# Altium PCB PCB引脚图.PcbDoc
Units mil, origin at the board's own origin, x right, y up, seen from the top; angles counter-clockwise.
Board outline 6000 x 4000 mil, 2 copper layers (Top Layer, Bottom Layer); 2 components, 34 nets, 14 pads, 0 vias.
Unrouted connection lines stored in the file: 1.
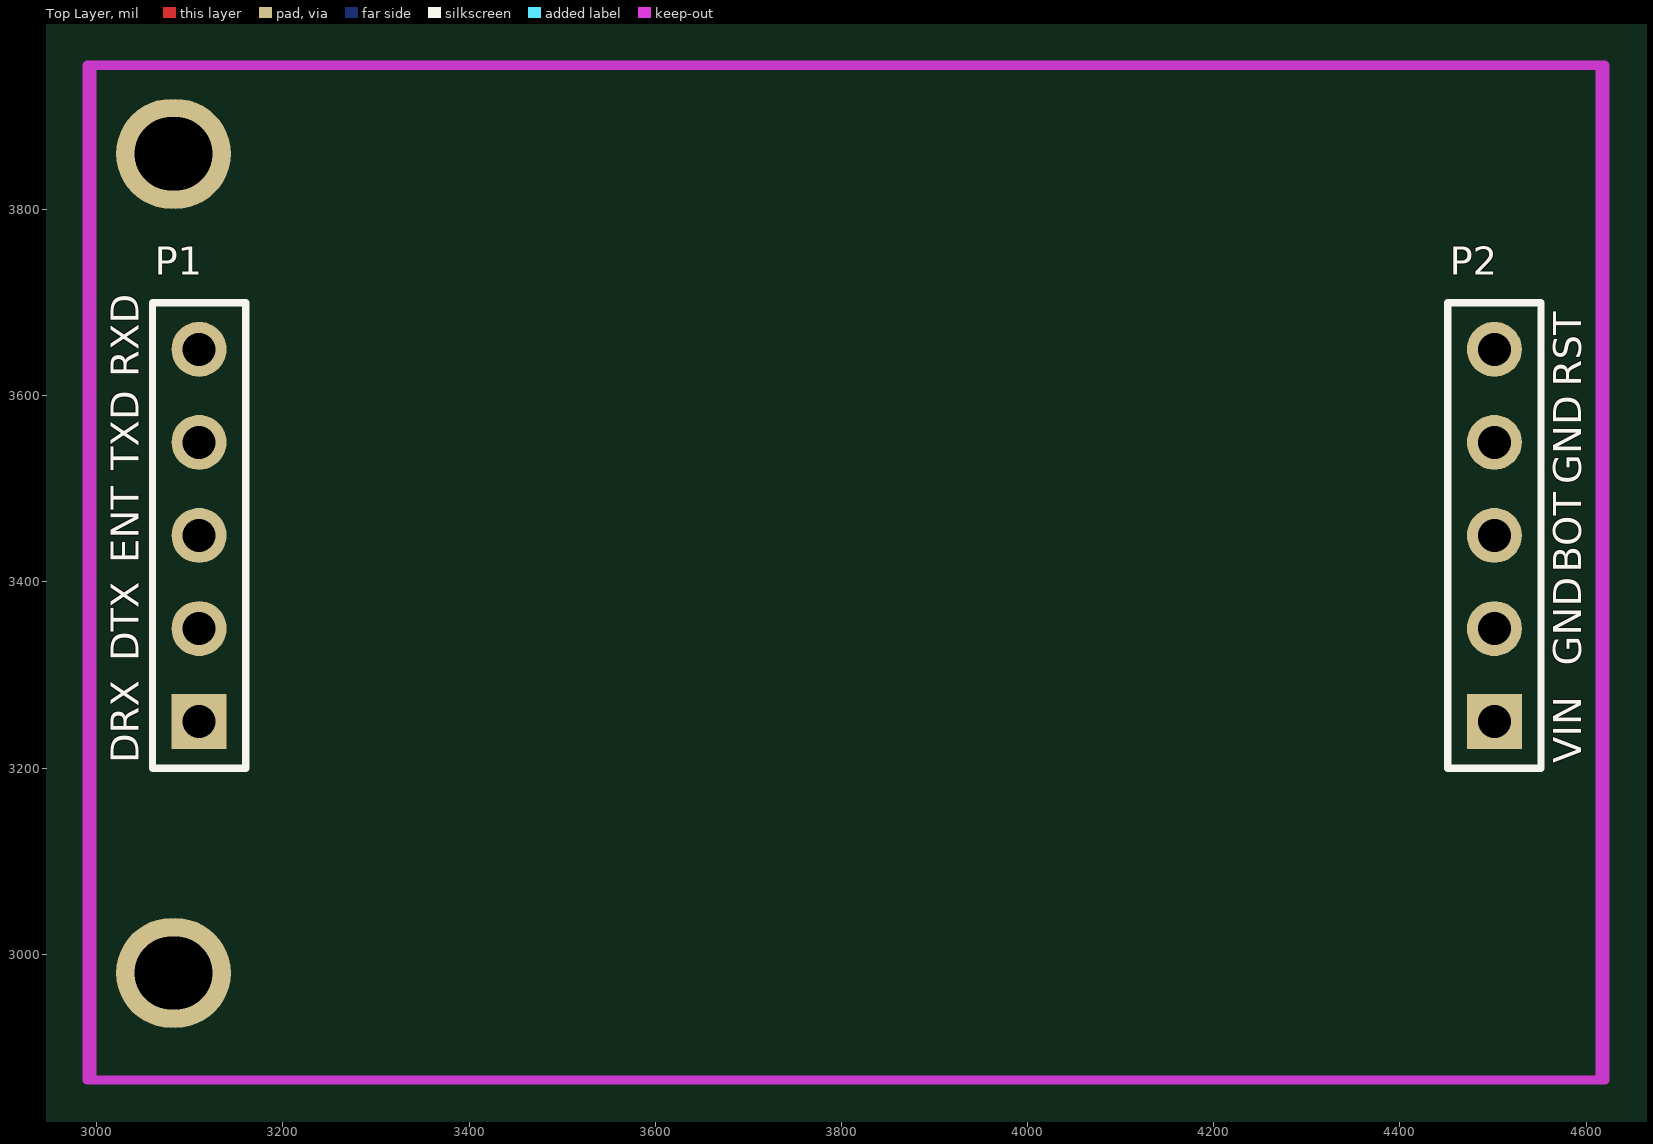
[diagram p0: Top Layer view]
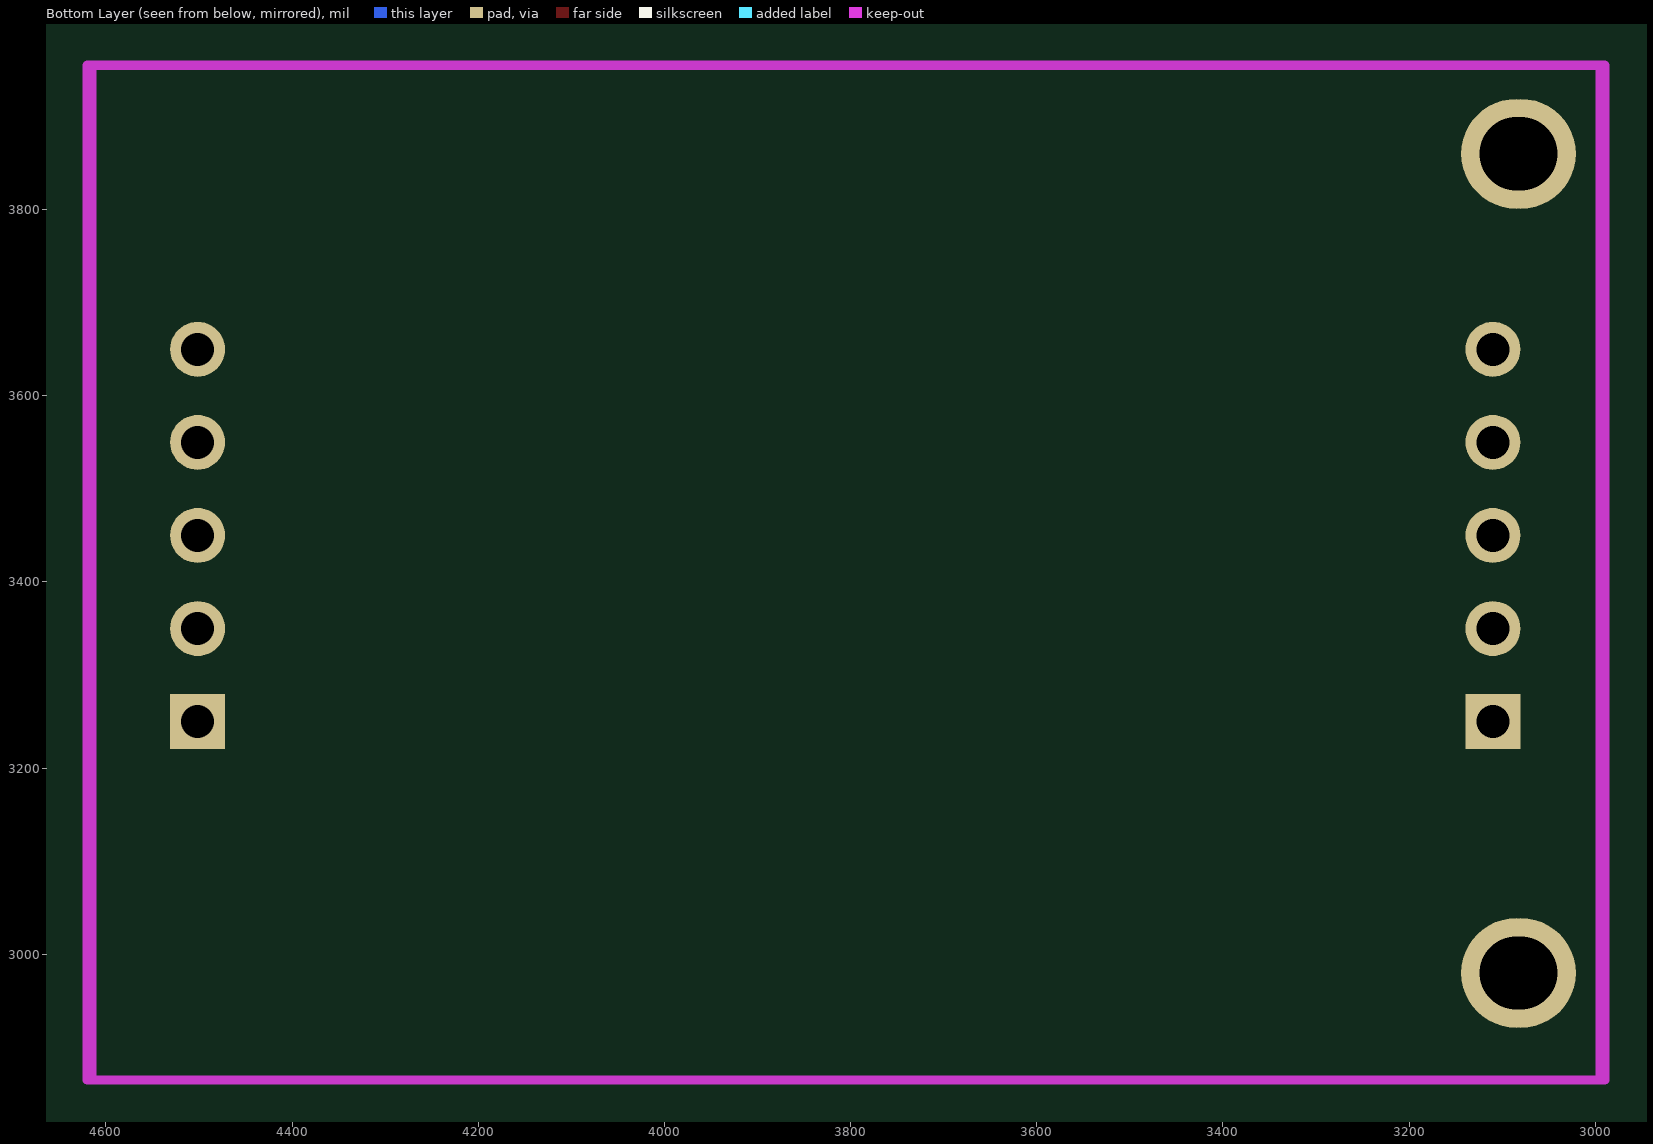
[diagram p1: Bottom Layer view, seen from below]

## Layer stack, top to bottom
Top Layer: signal copper 1.4
Dielectric: dielectric 12.6, FR-4, Dk 4.8
Bottom Layer: signal copper 1.4

## Board outline
1000,1000 7000,1000 7000,5000 1000,5000

## Design rules (kind name [scope] priority, off if disabled: settings)
Clearance [All] p1: gap=5.91
PlaneConnect [All] p1: planeconnectstyle=Direct reliefexpansion=20 reliefentries=4 reliefconductorwidth=10 reliefairgap=10
PolygonConnect [All] p1: connectstyle=Direct reliefconductorwidth=10 reliefentries=4 polygonreliefangle="90 Angle"
RoutingVias [All] p1: holewidth=28 width=50 viastyle="Through Hole" minholewidth=28 minwidth=50 maxholewidth=28 maxwidth=50
SilkToSilkClearance [InNet('No Net') vs InNet('No Net')] p1: silktosilkclearance=10
SilkscreenOverComponentPads [All] p1: minsilkscreentomaskgap=10
SolderMaskExpansion [All] p1: expansion=4
Width [All] p1: maxlimit=100 minlimit=10 preferedwidth=10 minimp=50.000000 maximp=50.000000 favimp=50.000000
25 further rules are at their usual default settings.

## Components (designator, comment, footprint, x,y, rotation, side; value= is the part's Value field where it differs from the comment)
P1 "串口对外接口" HDR1X5 3110,3250 r90 top
P2 "电源接口" HDR1X5 4501.59,3250 r90 top

## Footprints (in the part's own frame and the unit in brackets; to place one, negate y for a bottom-side part, rotate by r counter-clockwise, add the part's x,y. Pads: shape width x height; smd on the part's side, far side on the other; paste and mask are expansions set on the pad)
HDR1X5 [mm] "Connector; Header; 5 Position"
  rect 1.5x1.5 hole 0.9: 1(0,0)
  round 1.5 hole 0.9: 2(2.54,0) 3(5.08,0) 4(7.62,0) 5(10.16,0)
  silkscreen extent -1.27,-1.27 11.43,1.27

## Part data
P1 P2: library part "Header 5", "Header, 5-Pin"

## Free pads (board coordinates)
  round 118.11 hole 78.74: 0(3080,3860) 0(3085,3860) 1(3080,2980) 1(3085,2980)

## Nets (pads, with @x,y where several pads share a name; then routed paths per layer and width w, separated by ;. In a path a pad name is that pad's centre, name@x,y a point inside that pad or via, vN(x,y) a via of type N, cw(c..) or ccw(c..) an arc to the next point about the centre after c; other vN are vias at no path point)
3V3: 
5V: P2.1
BOOT: P2.3
DRX: P1.1
DTX: P1.2
E_RXD: P1.4
E_TXD: P1.5
ENT: P1.3
GND: P2.2 P2.4
NET: 
NetC1_2: 
NetC2_2: 
NetC5_2: 
NetC11_1: 
NetD1_1: 
NetD1_2: 
NetD2_1: 
NetJ2_1: 
NetQ1_2: 
NetQ2_2: 
NetQ3_2: 
NetQ4_2: 
NetR7_2: 
NetR16_2: 
PSM_ENT: 
RESET: 
RST: P2.5
RXD: 
SIM_CLK: 
SIM_DATA: 
SIM_RST: 
SIM_VCC: 
TXD: 
VDD_EXT: 

## Keep-outs
Keep-Out Layer:
  lines w10: 2990,2865 2990,3955 4615,3955 4615,2865 2990,2865 ; 2995,2865 4620,2865 4620,3955 2995,3955 2995,2865

## Silkscreen, mask and mechanical layers (free items; w line width, h text height)
Top Overlay:
  text "RXD" at 3045,3620 h30 r90
  text "RST" at 4595,3610 h30 r90
  text "TXD" at 3045,3520 h30 r90
  text "GND" at 4595,3505 h30 r90
  text "ENT" at 3045,3420 h30 r90
  text "BOT" at 4595,3410 h30 r90
  text "DTX" at 3045,3315 h30 r90
  text "GND" at 4595,3310 h30 r90
  text "DRX" at 3045,3205 h30 r90
  text "VIN" at 4595,3205 h30 r90